# Altium PCB pcb5.PcbDoc
Units mil, origin at the board's own origin, x right, y up, seen from the top; angles counter-clockwise.
Board outline 2900 x 3720 mil, 4 copper layers (SIG/PWR1, GND1, SIG/PWR2, GND2), stack 23.756 mil thick; 78 components, 67 nets, 242 pads, 145 vias.
Unrouted connection lines stored in the file: 14.
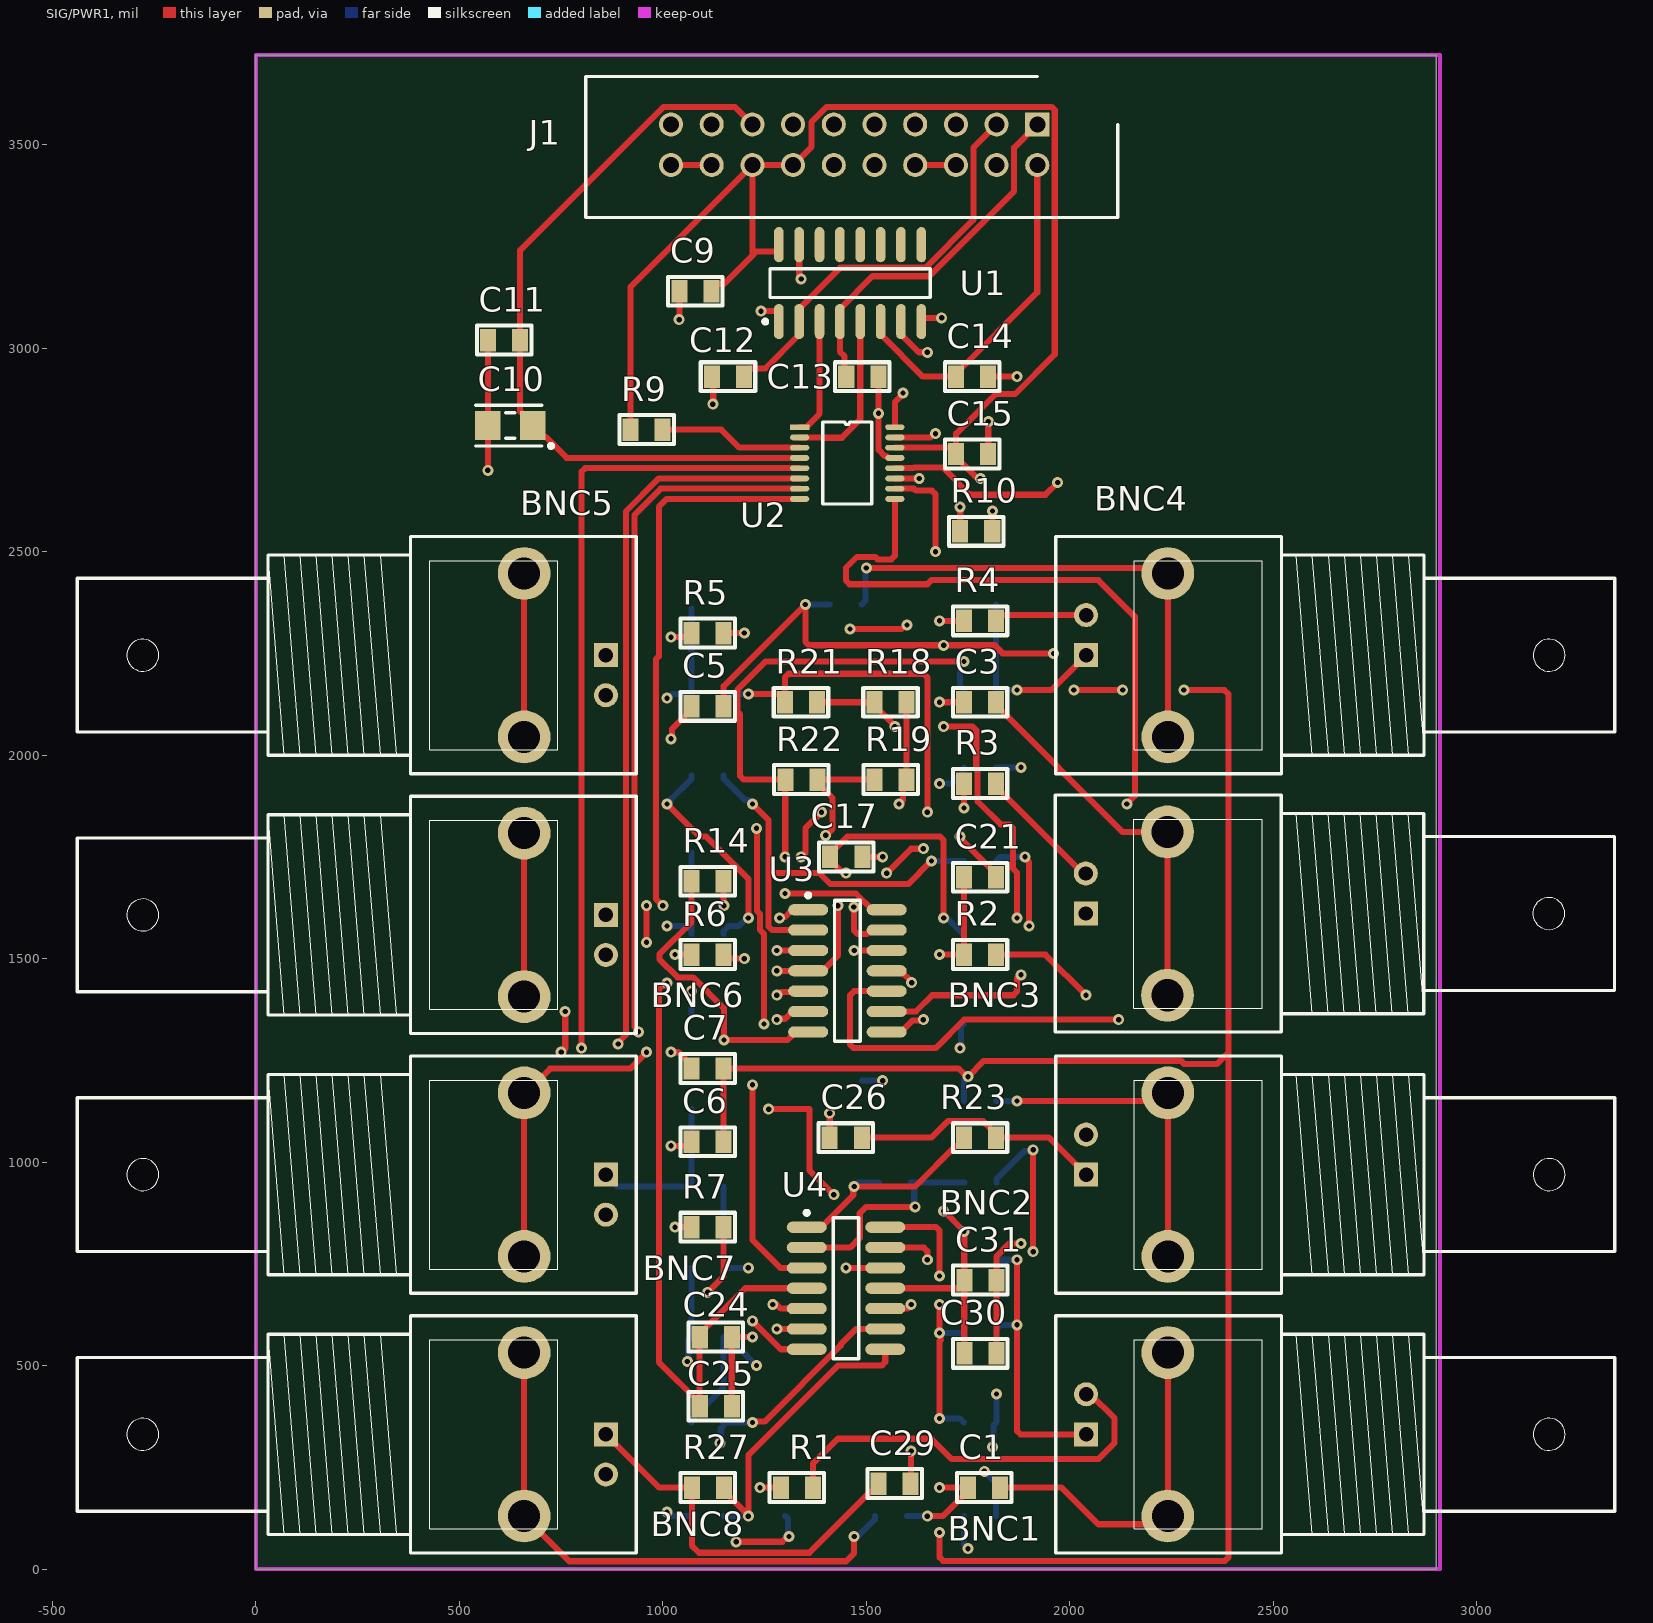
[diagram p0: SIG/PWR1 view]
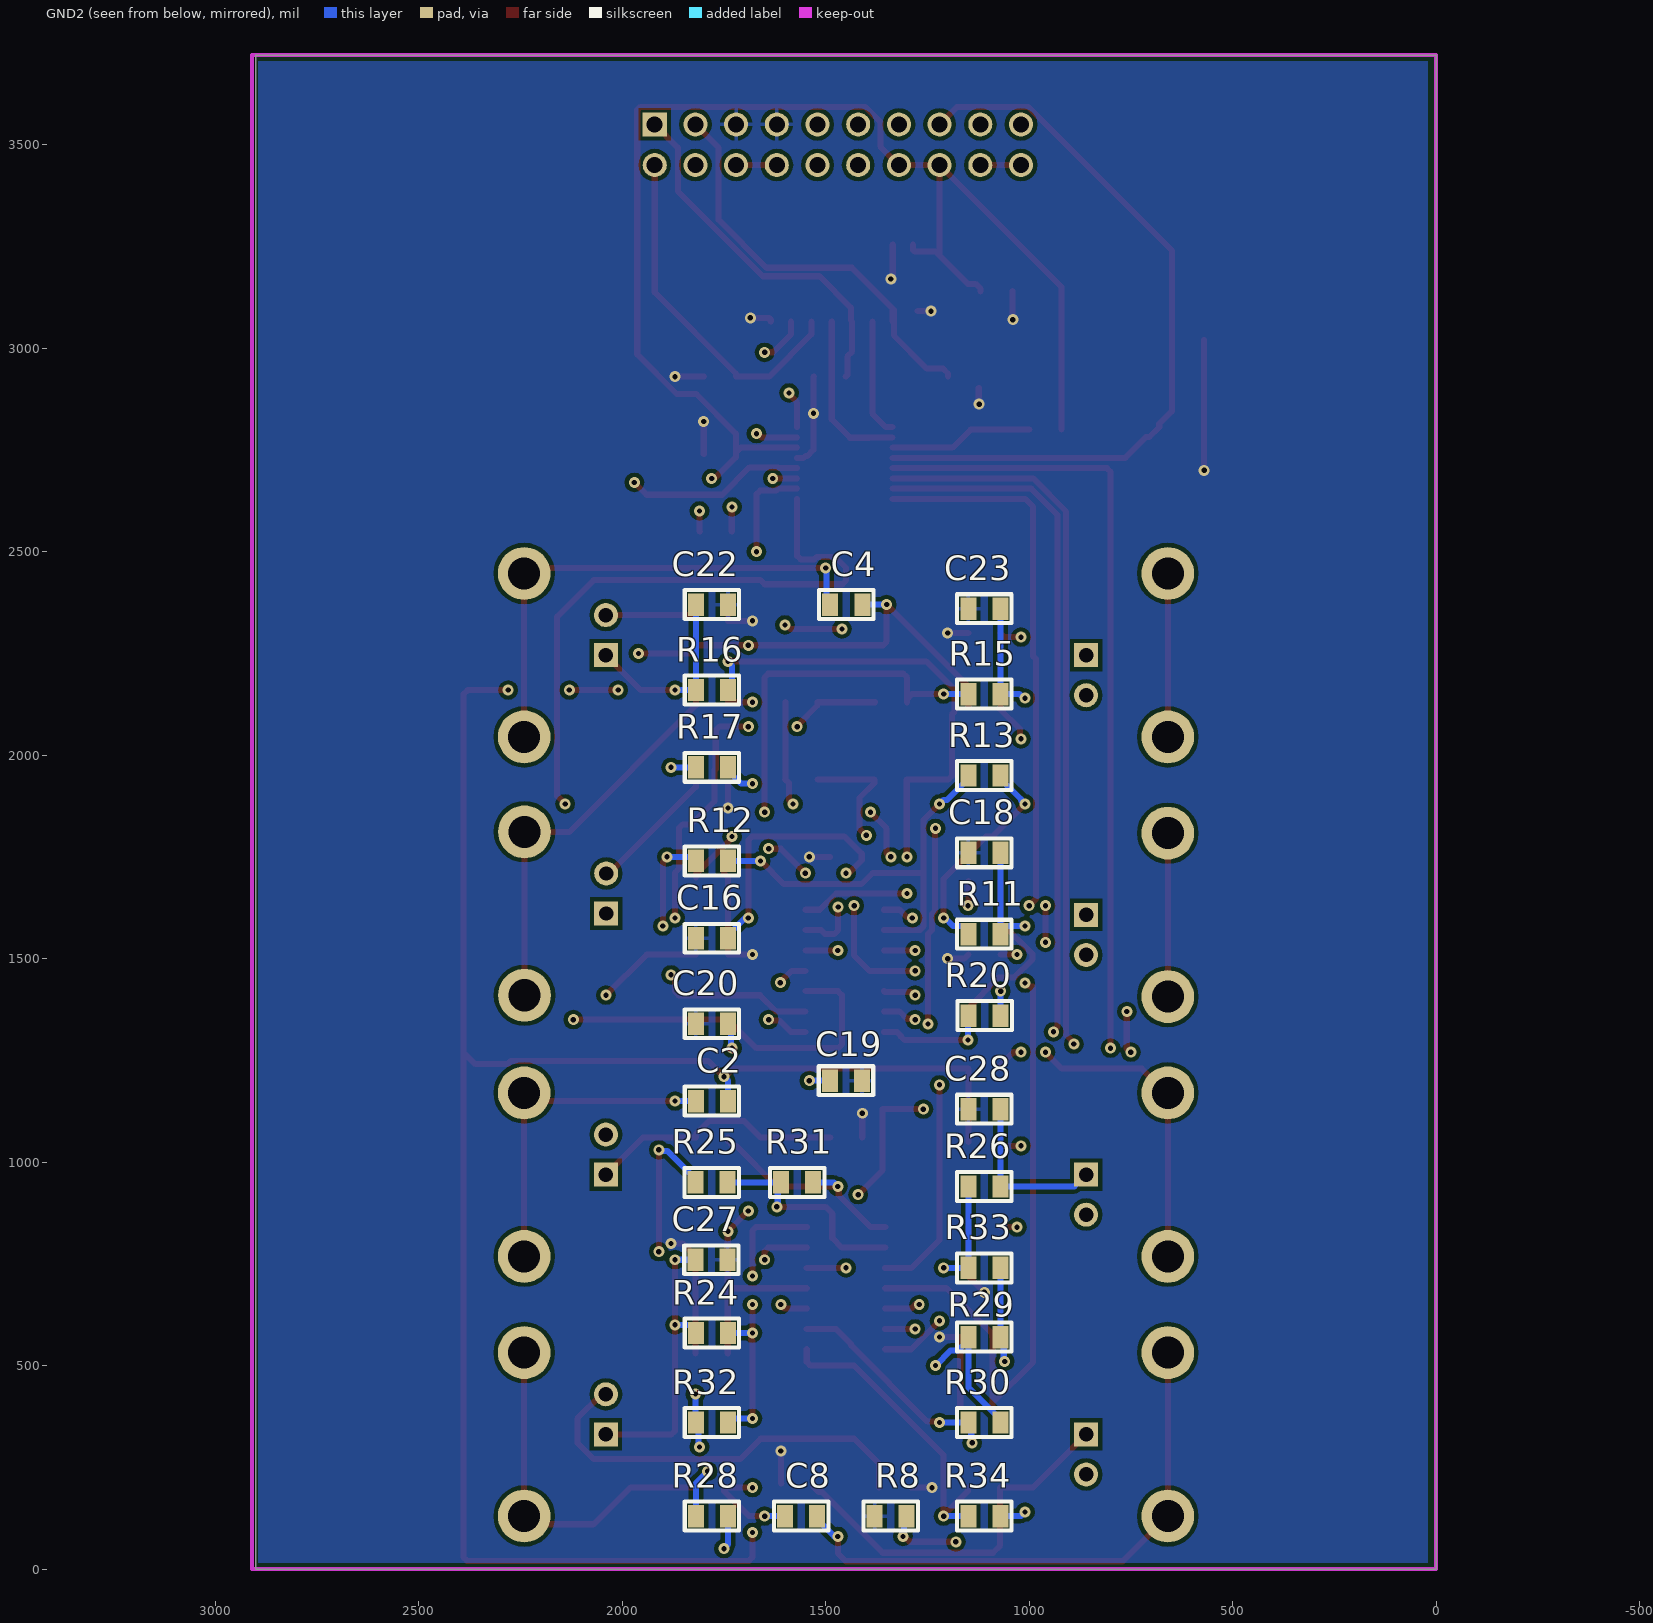
[diagram p1: GND2 view, seen from below]
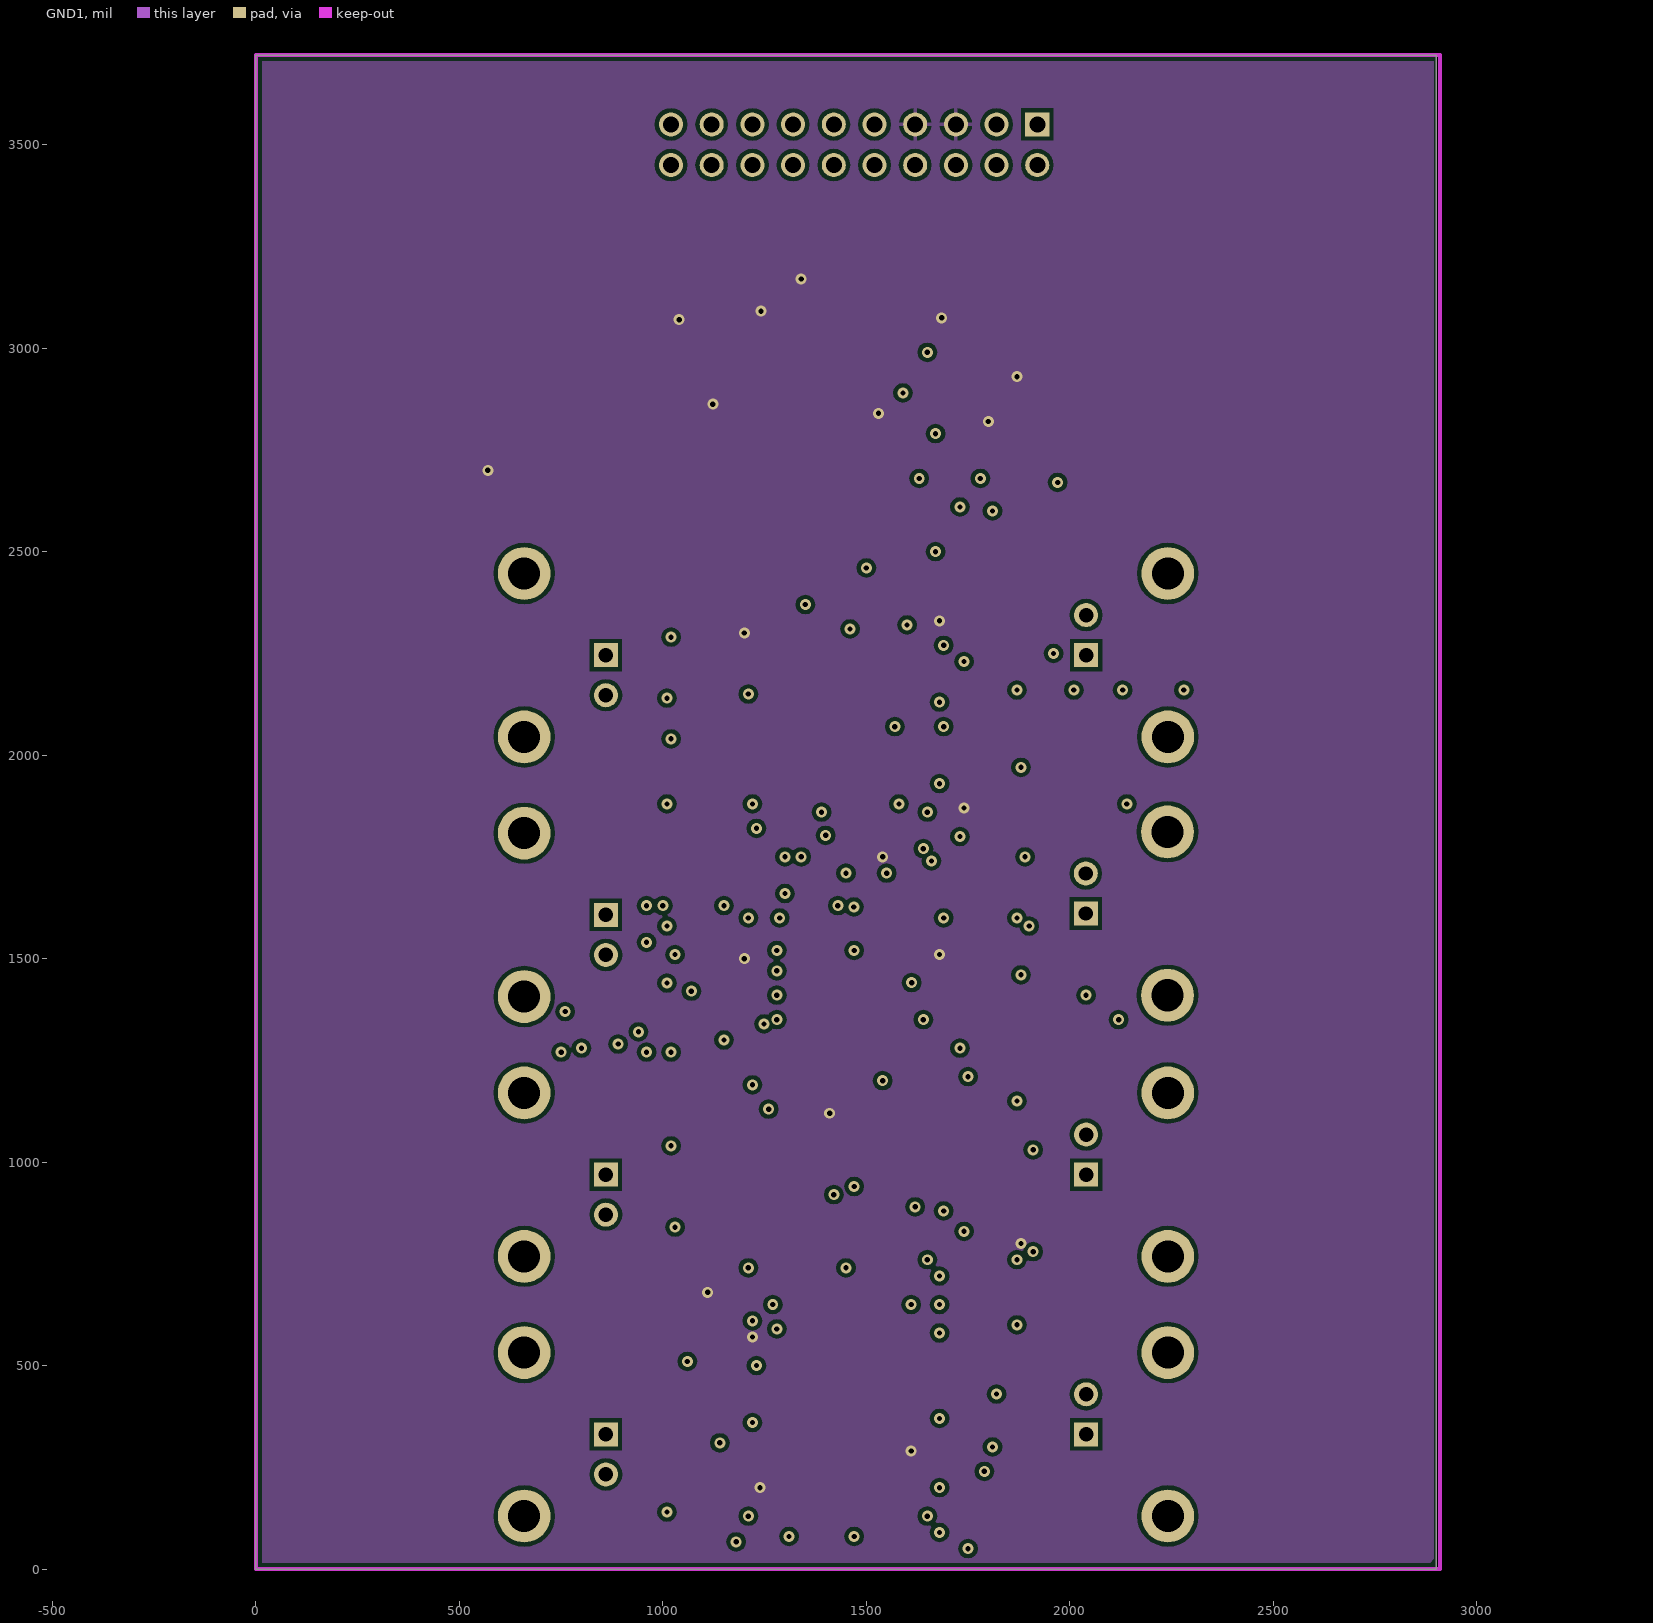
[diagram p2: GND1]
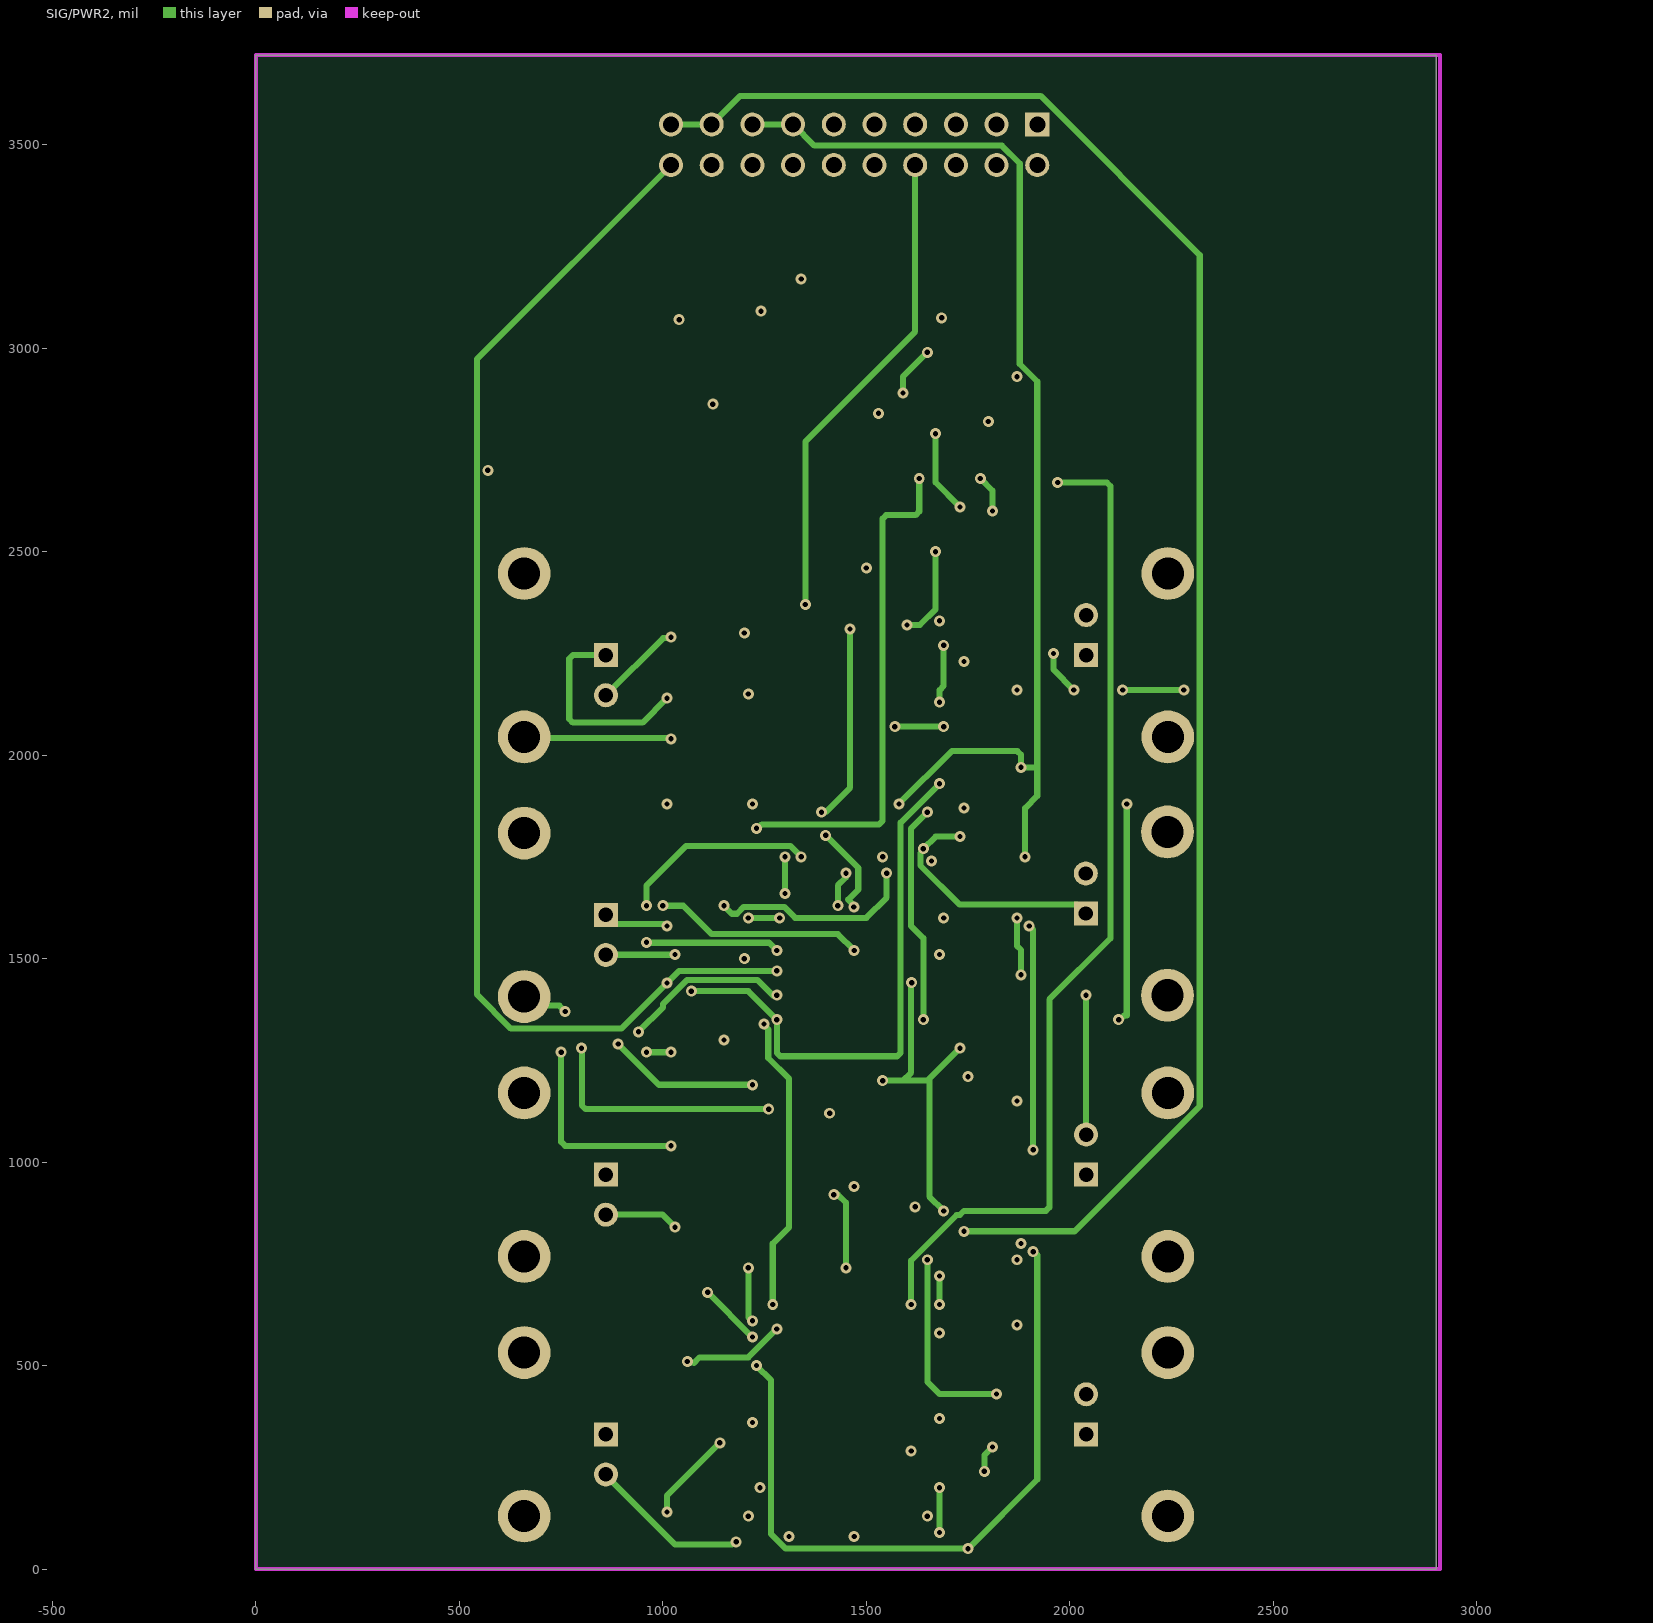
[diagram p3: SIG/PWR2]

## Layer stack, top to bottom
Top Solder: solder mask 0.4, Solder Resist, Dk 3.5
SIG/PWR1: signal copper 1.4
Dielectric 2: prepreg 2.8, PP-006, Dk 4.1
GND1: signal copper 1.378
Dielectric 1: dielectric 12.6, FR-4, Dk 4.8
SIG/PWR2: signal copper 1.378
Dielectric 3: prepreg 2.8, PP-006, Dk 4.1
GND2: signal copper 1.4
Bottom Solder: solder mask 0.4, Solder Resist, Dk 3.5

## Board outline
0,0 0,2800 0,3720 2900,3720 2900,2800 2900,0

## Design rules (kind name [scope] priority, off if disabled: settings)
Clearance [All] p1: gap=6 ignorepadtopadclearanceinfootprint=FALSE except(10: Arc-Poly Track-Poly SMDPad-Poly THPad-Poly Via-Poly Fill-Poly Poly-Poly)
MinimumSolderMaskSliver [All] p1: minsoldermaskwidth=0
PolygonConnect [All] p1: thpad.connectstyle=Relief thpad.reliefconductorwidth=10 thpad.reliefentries=4 thpad.polygonreliefangle="90 Angle" thpad.airgapwidth=10 smdpad.connectstyle=Relief smdpad.reliefconductorwidth=10 smdpad.reliefentries=4 smdpad.polygonreliefangle="90 Angle" smdpad.airgapwidth=10 via.connectstyle=Direct via.reliefconductorwidth=10 via.reliefentries=4 via.polygonreliefangle="90 Angle" via.airgapwidth=10
RoutingVias [All] p1: holewidth=12 width=24 viastyle="Through Hole" minholewidth=1 minwidth=12 maxholewidth=13 maxwidth=27
SilkToSilkClearance [All] p1: silktosilkclearance=1
SilkToSolderMaskClearance [IsPad] p1: minsilkscreentomaskgap=0 clearancetoexposedcopper=TRUE
SolderMaskExpansion [All] p1: expansion=3 istentingtop=FALSE
Width Width_2 [(InNet('+5V_ADC') OR InNet('-5V_ADC') OR InNet('D+5V'))] p1: maxlimit=18 minlimit=10 preferedwidth=15
Width [All] p2: maxlimit=20 minlimit=10 preferedwidth=15
27 further rules are at their usual default settings.

## Components (designator, comment, footprint, x,y, rotation, side; value= is the part's Value field where it differs from the comment)
BNC1 "BNC" BNC 2040,330.99 r180 top
BNC2 "BNC" BNC 2040,969.2 r180 top
BNC3 "BNC" BNC 2039.21,1610.79 r180 top
BNC4 "BNC" BNC 2040,2245.63 r180 top
BNC5 "BNC" BNC 860,2245.63 r0 top
BNC6 "BNC" BNC 860,1607.42 r0 top
BNC7 "BNC" BNC 860,969.2 r0 top
BNC8 "BNC" BNC 860,330.99 r0 top
C1 "102" 0805 1789.37,200 r180 top
C2 "102" 0805 1779.37,1150 r180 bottom
C3 "102" 0805 1779.37,2130 r180 top
C4 "102" 0805 1449.37,2370 r180 bottom
C5 "102" 0805 1110,2120 r0 top
C6 "102" 0805 1110,1050 r0 top
C7 "102" 0805 1110,1230 r0 top
C8 "102" 0805 1560.42,130 r0 bottom
C9 "104" 0805 1080,3140 r180 top value=0.1uF
C10 "10uf 6.3V" "1206 (钽电容)" 680.24,2810 r180 top
C11 "104" 0805 610,3020 r0 top value=101
C12 "101" 0805 1160,2930 r180 top
C13 "101" 0805 1490,2930 r0 top
C14 "101" 0805 1760,2930 r0 top
C15 "104" 0805 1760,2740 r180 top value=101
C16 "105" 0805 1779.37,1550 r180 bottom value=101
C17 "103" 0805 1450.63,1750 r0 top value=101
C18 "102" 0805 1110,1760 r0 bottom
C19 "105" 0805 1450,1200 r0 bottom value=101
C20 "103" 0805 1779.37,1340 r0 bottom value=101
C21 "102" 0805 1779.37,1700 r180 top
C22 "102" 0805 1779.37,2370 r180 bottom
C23 "102" 0805 1110,2360 r0 bottom
C24 "105" 0805 1130,570 r180 top value=101
C25 "103" 0805 1130,400 r0 top value=101
C26 "102" 0805 1449.37,1060 r180 top
C27 "102" 0805 1780.63,760 r180 bottom
C28 "102" 0805 1110,1130 r0 bottom
C29 "102" 0805 1569.37,210 r0 top
C30 "105" 0805 1780,530 r180 top value=101
C31 "103" 0805 1780,710 r0 top value=101
J1 "HIF3FC-20PA-2.54DSA" SHDR20W56P254_2X10_3290X850X950P 1920,3550 r180 top
R1 "0R" 0805 1329.37,200 r0 top value=10K
R2 "0R" 0805 1779.37,1510 r0 top value=10K
R3 "0R" 0805 1779.37,1930 r0 top value=10K
R4 "0R" 0805 1779.37,2330 r0 top value=10K
R5 "0R" 0805 1110,2300 r180 top value=10K
R6 "0R" 0805 1110,1510 r180 top value=10K
R7 "0R" 0805 1110,840 r180 top value=10K
R8 "0R" 0805 1340.21,130 r180 bottom value=10K
R9 "1k" 0805 960,2800 r0 top value=10K
R10 "1k" 0805 1770,2550 r180 top value=10K
R11 "510" 0805 1110,1560 r180 bottom value=3.3K
R12 "10k" 0805 1779.37,1740 r180 bottom value=10K
R13 "10k" 0805 1110,1950 r180 bottom value=10K
R14 "510" 0805 1110,1690 r0 top value=3.3K
R15 "510" 0805 1110,2150 r180 bottom value=3.3K
R16 "510" 0805 1779.37,2160 r0 bottom value=3.3K
R17 "10k" 0805 1779.37,1970 r180 bottom value=10K
R18 "10k" 0805 1559.37,2130 r180 top value=10K
R19 "10k" 0805 1559.79,1940 r180 top value=10K
R20 "10k" 0805 1109.37,1360 r0 bottom value=10K
R21 "10k" 0805 1339.37,2130 r180 top value=10K
R22 "10k" 0805 1340.21,1940 r180 top value=10K
R23 "510" 0805 1779.37,1060 r0 top value=3.3K
R24 "510" 0805 1779.37,580 r0 bottom value=3.3K
R25 "10k" 0805 1780,950 r180 bottom value=10K
R26 "510" 0805 1110,940 r180 bottom value=3.3K
R27 "510" 0805 1110.63,200 r180 top value=3.3K
R28 "10k" 0805 1779.37,130 r0 bottom value=10K
R29 "10k" 0805 1110,570 r180 bottom value=10K
R30 "10k" 0805 1110,360 r0 bottom value=10K
R31 "10k" 0805 1570,950 r180 bottom value=10K
R32 "10k" 0805 1779.37,360 r180 bottom value=10K
R33 "10k" 0805 1110,740 r0 bottom value=10K
R34 "10k" 0805 1110,130 r0 bottom value=10K
U1 "SN74HC365D" D016_N 1460,3160 r90 top
U2 "DAC_MAX5307" TSSOP16 1336.14,2805.98 r0 top
U3 "LM224DR" SOIC14_M 1453.54,1470 r0 top
U4 "LM224DR" SOIC14_M 1450,690 r0 top

## Footprints (in the part's own frame and the unit in brackets; to place one, negate y for a bottom-side part, rotate by r counter-clockwise, add the part's x,y. Pads: shape width x height; smd on the part's side, far side on the other; paste and mask are expansions set on the pad)
0805 [mm]
  rect 1x1.4 smd: 1(-1,0) 2(1,0)
  silkscreen extent -1.7,-0.9 1.7,0.9
"1206 (钽电容)" [mm]
  rect 1.6x1.8 smd: 1(0,0) 2(2.8,0)
  silkscreen extent -1.27,-1.27 3.56,1.39
BNC [mm]
  rect 1.5x1.5 hole 0.9: 1(0,0)
  round 1.5 hole 0.9: 2(0,-2.5)
  round 3.3 hole 2: 3(-5.1,5.1) 4(-5.1,-5.1)
  silkscreen extent -33,-7.4 1.9,7.4
D016_N [mm]
  oval 2.2x0.6 smd: 1(-2.4,4.445) 2(-2.4,3.175) 3(-2.4,1.905) 4(-2.4,0.635) 5(-2.4,-0.635) 6(-2.4,-1.905) 7(-2.4,-3.175) 8(-2.4,-4.445) 9(2.4,-4.445) 10(2.4,-3.175) 11(2.4,-1.905) 12(2.4,-0.635) 13(2.4,0.635) 14(2.4,1.905) 15(2.4,3.175) 16(2.4,4.445)
  silkscreen extent -2.52,-5 0.9,5.42
SHDR20W56P254_2X10_3290X850X950P [mm]
  rect 1.5x1.5 hole 1: 1(0,0)
  round 1.5 hole 1: 2(0,2.54) 3(2.54,0) 4(2.54,2.54) 5(5.08,0) 6(5.08,2.54) 7(7.62,0) 8(7.62,2.54) 9(10.16,0) 10(10.16,2.54) 11(12.7,0) 12(12.7,2.54) 13(15.24,0) 14(15.24,2.54) 15(17.78,0) 16(17.78,2.54) 17(20.32,0) 18(20.32,2.54) 19(22.86,0) 20(22.86,2.54)
  silkscreen extent -5.02,-2.98 28.18,5.82, body extent -5.02,-2.98 27.88,5.52, height 9.5
SOIC14_M [mm]
  oval 2.5x0.7 smd: 1(-2.45,3.81) 2(-2.45,2.54) 3(-2.45,1.27) 4(-2.45,0) 5(-2.45,-1.27) 6(-2.45,-2.54) 7(-2.45,-3.81) 8(2.45,-3.81) 9(2.45,-2.54) 10(2.45,-1.27) 11(2.45,0) 12(2.45,1.27) 13(2.45,2.54) 14(2.45,3.81)
  silkscreen extent -2.57,-4.4 0.8,4.83, body extent -2,-4.38 2,4.38, height 1.75
TSSOP16 [mm]
  rect 1.2x0.36 smd: 1(0,0)
  oval 1.2x0.36 smd: 2(0,-0.64) 3(0,-1.28) 4(0,-1.92) 5(0,-2.56) 6(0,-3.2) 7(0,-3.84) 8(0,-4.48) 9(5.94,-4.48) 10(5.94,-3.84) 11(5.94,-3.2) 12(5.94,-2.56) 13(5.94,-1.92) 14(5.94,-1.28) 15(5.94,-0.64) 16(5.94,0)
  silkscreen extent 1.43,-4.8 4.5,0.32

## Part data
BNC1 BNC2 BNC3 BNC4 BNC5 BNC6 BNC7 BNC8: "BNC Elbow Connector", LatestRevisionDate=17-Jul-2002, LatestRevisionNote="Re-released for DXP Platform.", Publisher="Altium Limited"
C1 C2 C3 C4 C5 C6 C7 C8 C12 C13 C14: library part "Cap Semi", "Capacitor (Semiconductor SIM Model)", LatestRevisionDate=17-Jul-2002, LatestRevisionNote="Re-released for DXP Platform.", PackageReference=C1206, Published=8-Jun-2000, Publisher="Altium Limited"
C9 C11 C15 C16 C17 C18 C19 C20 C21 C22 C23 C24 C25 C26 C27 C28 C29 C30 C31: library part Cap, "Capacitor", LatestRevisionDate=17-Jul-2002, LatestRevisionNote="Re-released for DXP Platform.", PackageReference=RAD-0.3, Published=8-Jun-2000, Publisher="Altium Limited"
C10: library part "Cap Pol1", "Polarized Capacitor (Radial)", LatestRevisionDate=17-Jul-2002, LatestRevisionNote="Re-released for DXP Platform.", Published=8-Jun-2000, Publisher="Altium Limited"
J1: "Connector", Arrow Part Number=HIF3FC-20PA-2.54DSA(71), Manufacturer_Name=Hirose, Mouser Part Number=798-HIF3FC20PA254D71, Arrow Price/Stock=https://www.arrow.com/en/products/hif3fc-20pa-2.54dsa-71/hirose-electric?region=nac, Datasheet Link=https://www.hirose.com/product/en/products/HIF3FC/HIF3FC-20PA-2.54DSA%2871%29/, Height=9.5mm, Manufacturer_Part_Number=HIF3FC-20PA-2.54DSA(71), Mouser Price/Stock=https://www.mouser.co.uk/ProductDetail/Hirose-Connector/HIF3FC-20PA-254DSA71?qs=eDUdFcBPps3XO21sCrEU%252BQ%3D%3D, System=Connector
R1 R2 R3 R4 R5 R6 R7 R8 R9 R10 R11 R12 R13 R14 R15 R16 R17 R18 R19 R20 R21 R22 R23 R24 R25 R26 R27 R28 R29 R30 R31 R32 R33 R34: library part Res2, "Resistor", LatestRevisionDate=17-Jul-2002, LatestRevisionNote="Re-released for DXP Platform.", PackageReference=AXIAL-0.4, Published=8-Jun-2000, Publisher="Altium Limited"
  R11 R14 R15 R16 R23 R24 R26 R27: PackageDescription="Axial Device, Thru-Hole; 2 Leads; 0.4 in Pin Spacing"
U2: library part MAX5307, "12-Bit DACs with Serial Interfece", Code_IPC=SOIC127P1030-16, Code_JEDEC=MS-013-AA, ComponentLink1Description="Manufacturer Link", ComponentLink1URL=http://www.maxim-ic.com/, ComponentLink2Description=Datasheet, ComponentLink2URL=http://pdfserv.maxim-ic.com/en/ds/MAX520-MAX521.pdf, DatasheetVersion=Sep-1996, LatestRevisionDate=13-Apr-2006, LatestRevisionNote="IPC-7351 Footprint Added.", PackageDescription="16-Pin Small Outline Integrated Circuit 1.27 mm Pitch", PackageReference=WSO16, Published=16-Jan-2001, Publisher="Altium Limited"
U3 U4: library part LM124

## Via types
v1: diameter 27, hole 13, SIG/PWR1 to GND2, 145 vias

## Nets (pads, with @x,y where several pads share a name; then routed paths per layer and width w, separated by ;. In a path a pad name is that pad's centre, name@x,y a point inside that pad or via, vN(x,y) a via of type N, cw(c..) or ccw(c..) an arc to the next point about the centre after c; other vN are vias at no path point)
-5V_ADC: C19.2 C20.1 C30.2 C31.1 J1.17 J1.19 U3.11 U4.11 | length 5859.9
  SIG/PWR1 w15: U4.11 1728.45,690 C31.1@1740.63,702.18 ; U3.11 1583.84,1470 1611.24,1442.6 v1(1611.24,1441.01) ; v1(1690,880) v1(1740,830) 1740.63,829.37 C31.1 C31.1@1740.63,702.19 ; C30.2 C31.1@1740.63,702.18
  SIG/PWR2 w15: J1.19 J1.17 1190,3620 1928.15,3620 2319.25,3228.9 2319.25,1137.49 2011.76,830 v1(1740,830) ; v1(1540,1200) 1590,1200 ; v1(1611.24,1441.01) 1610,1439.77 1610,1220 1590,1200 ; v1(1690,880) 1655,915 1655,1205 ; v1(1730,1280) 1655,1205 ; 1590,1200 1650,1200 1655,1205
  GND2 w15: C19.2 v1(1540,1200) ; v1(1730,1280) 1732.3,1282.3 1732.3,1332.3 C20.1
A+5V: C16.2 C17.1 C24.2 C25.1 J1.18 J1.20 U3.4 U4.4 | length 5752.1
  SIG/PWR1 w15: v1(1010,1440) 1006.75,1440 997.97,1431.21 990,1431.21 990,508.5 C25.1@1090,408.5 ; J1.20 J1.18 ; C25.1 1090.63,407.87 C25.1@1090,408.5 ; v1(1280,1470) U3.4 1392.52,1470 1430,1507.48 v1(1430,1630) ; U4.4 1202.76,690 1090.63,577.87 C24.2 1090,569.37 C25.1@1090,408.5 ; v1(1450,1710) 1447.7,1712.3 1441.09,1712.3 1411.26,1742.13 C17.1 1411.26,1757.87 1453.39,1800 1681.21,1800 1690,1791.21 v1(1690,1600)
  SIG/PWR2 w15: J1.20 543,2973 543,1411.88 626.71,1328.17 898.17,1328.17 1040,1470 v1(1280,1470) ; v1(1430,1630) 1430,1680 1450,1700 v1(1450,1710)
  GND2 w15: v1(1690,1600) 1697.87,1600 1740,1557.87 C16.2
AGND: C9.2 C10.2 C11.1 C12.2 C13.2 C14.2 C15.1 C16.1 C17.2 C18.2 C19.1 C20.2 C21.2 C22.2 C23.2 C24.1 C25.2 C26.2 C27.2 C28.2 C29.2 C30.1 C31.2 J1.5 J1.7 R1.1 R2.1 R3.1 R4.1 R5.1 R6.1 R7.1 R8.1 U1.1 U1.8 U1.15 U2.13 | length 2590
  SIG/PWR1 w15: v1(570,2700) C10.2 570.63,2810.63 C11.1 ; v1(1040,3070) 1040.63,3070.63 C9.2 ; v1(1110,680) 1149.37,719.37 R7.1 ; v1(1122.89,2862.51) 1123.91,2863.54 C12.2@1123.91,2902.51 ; R6.1 1159.37,1500 v1(1200,1500) ; R5.1 v1(1200,2300) ; C25.2 C24.1 v1(1220,570) ; v1(1238.91,200) R1.1 ; v1(1241.05,3091.05) U1.1@1274.18,3091.05 ; U1.15 1335,3178.25 1340,3173.25 v1(1340,3170) ; C26.2 v1(1410,1120) ; C17.2 v1(1540,1750) ; C13.2 1530,2929.37 v1(1530,2840) 1530,2749.94 1544.94,2735 1549.68,2735 1554.29,2730.39 U2.13 ; C29.2 1609.37,210.63 1609.37,289.37 v1(1610,290) ; U1.8 1635,3070.51 1638.98,3074.49 v1(1685,3074.49) ; v1(1680,1510) R2.1 C21.2 C21.2@1750,1710 ; v1(1680,2330) R4.1 R4.1@1740,2337.87 ; v1(1740,1870) R3.1 ; C15.1 1799.63,2740.26 1799.63,2819.86 v1(1799.88,2820.12) ; C14.2 v1(1870,2930) ; C30.1 C31.2 1819.37,767.85 1851.52,800 v1(1880,800)
  SIG/PWR2 w15: v1(1110,680) v1(1220,570)
D+5V: C9.1 C15.2 J1.14 J1.16 R9.1 R10.1 U1.16 U2.14 | length 3425.5
  SIG/PWR1 w15: R9.1 920.63,3150.63 J1.16 ; C9.1 1119.37,3145.9 1131.56,3158.08 1150.35,3158.08 1220,3227.73 ; U1.16 1285,3241.71 1281.02,3237.73 1230,3237.73 1220,3227.73 ; U2.14 1708.44,2755.59 1720.63,2743.4 1720.63,2732.13 1772.76,2680 v1(1780,2680) ; C15.2 1720.63,2790.06 1818.02,2887.45 1865.64,2887.45 1963.03,2984.84 1963.03,3585.12 1955.12,3593.03 1402.18,3593.03 1365.3,3556.15 1365.3,3495.3 J1.14 J1.16 ; R10.1 1809.68,2550.32 1809.68,2599.68 v1(1810,2600) ; 1220,3227.73 J1.16
  SIG/PWR2 w15: v1(1780,2680) 1810,2650 v1(1810,2600)
DACA: BNC1.1 C27.1 R24.2 | length 708
  SIG/PWR1 w15: v1(1870,760) v1(1870,600) 1870,339.78 1878.79,330.99 BNC1.1
  GND2 w15: R24.2 1818.74,587.81 1830.93,600 v1(1870,600) ; C27.1 v1(1870,760)
DACB: BNC2.1 C26.1 R23.2 | length 627.5
  SIG/PWR1 w15: C26.1 1660,1060 1701.06,1101.06 1785.55,1101.06 1818.74,1067.87 R23.2 1949.2,1060 BNC2.1
DACC: BNC3.1 C21.1 R14.2 | length 1420.4
  SIG/PWR1 w15: R14.2 1149.37,1630.63 v1(1150,1630) ; v1(1550,1710) 1560,1720 1610,1770 v1(1640,1770) ; v1(1730,1800) 1730,1796.61 1818.74,1707.87 C21.1
  SIG/PWR2 w15: v1(1150,1630) 1169.69,1610.31 1182.12,1610.31 1198.82,1627 1298.18,1627 1325.18,1600 1500,1600 1550,1650 v1(1550,1710) ; v1(1730,1800) 1670,1800 v1(1640,1770) 1640,1766.75 1633,1759.75 1633,1728.82 1729,1632.82 2017.18,1632.82 BNC3.1
DACD: BNC4.1 C22.1 R16.2 | length 466.7
  SIG/PWR1 w15: v1(1870,2160) 1954.37,2160 BNC4.1
  GND2 w15: C22.1 R16.2 v1(1870,2160)
DACE: BNC5.1 C23.1 R15.2 | length 785
  SIG/PWR2 w15: BNC5.1 778.79,2245.63 770,2236.84 770,2088.79 778.79,2080 950,2080 v1(1010,2140)
  GND2 w15: v1(1010,2140) 1013.25,2140 1023.25,2150 R15.2 C23.1
DACF: BNC6.1 C18.1 R11.2 | length 427
  SIG/PWR2 w15: BNC6.1 882.03,1585.39 1001.36,1585.39 1006.75,1580 v1(1010,1580)
  GND2 w15: v1(1010,1580) 1058.44,1580 R11.2@1070.63,1567.81 ; R11.2 R11.2@1070.63,1567.81 ; C18.1 R11.2@1070.63,1567.81
DACG: BNC7.1 C28.1 R26.2 | length 412.7
  GND2 w15: BNC7.1 889.2,940 R26.2 C28.1
DACH: BNC8.1 C29.1 R27.2 | length 949
  SIG/PWR1 w15: BNC8.1 990.99,200 R27.2 1071.26,57.53 1088.79,40 1360,40 1509.94,189.94 1517.81,189.94 1530,202.13 C29.1
NetBNC1_2: BNC1.2 R1.2 | length 1017.3
  SIG/PWR1 w15: R1.2 1368.74,258.74 1430,320 1660,320 1710,270 2070,270 2110,310 2110,370 2050.59,429.41 BNC1.2
NetBNC1_3: BNC1.3 BNC1.4 C1.1 | length 859.3
  SIG/PWR1 w15: C1.1 1980,200 2070,110 2220.59,110 BNC1.3 BNC1.4
NetBNC2_2: BNC2.2 R2.2 | length 605.1
  SIG/PWR1 w15: R2.2 1940,1510 v1(2040,1410)
  SIG/PWR2 w15: BNC2.2 v1(2040,1410)
NetBNC2_3: BNC2.3 BNC2.4 C2.1 | length 831.9
  SIG/PWR1 w15: v1(1870,1150) 2220.8,1150 BNC2.4 BNC2.3
  GND2 w15: C2.1 v1(1870,1150)
NetBNC3_2: BNC3.2 R3.2 | length 316.5
  SIG/PWR1 w15: R3.2 1818.74,1922.13 2031.65,1709.21 BNC3.2
NetBNC3_3: BNC3.3 BNC3.4 C3.1 | length 959.3
  SIG/PWR1 w15: C3.1 1818.74,2122.13 2129.29,1811.58 BNC3.4 BNC3.3
NetBNC4_2: BNC4.2 R4.2 | length 228.2
  SIG/PWR1 w15: R4.2 1818.74,2331.87 1830.93,2344.05 BNC4.2
NetBNC4_3: BNC4.3 BNC4.4 C4.1 | length 1242.7
  SIG/PWR1 w15: v1(1500,2460) 2227.21,2460 BNC4.4 BNC4.3
  GND2 w15: C4.1 1497.7,2378.96 1497.7,2457.7 v1(1500,2460)
NetBNC5_2: BNC5.2 R5.2 | length 273.9
  SIG/PWR1 w15: v1(1020,2290) 1060.63,2290 R5.2
  SIG/PWR2 w15: BNC5.2 1000.5,2287.7 1017.7,2287.7 v1(1020,2290)
NetBNC5_3: BNC5.3 BNC5.4 C5.1 | length 865.3
  SIG/PWR1 w15: BNC5.4 BNC5.3 ; v1(1020,2040) 1022.3,2042.3 1022.3,2063.79 1070.63,2112.13 C5.1
  SIG/PWR2 w15: BNC5.4 661.76,2042.3 1017.7,2042.3 v1(1020,2040)
NetBNC6_2: BNC6.2 R6.2 | length 211
  SIG/PWR1 w15: v1(1030,1510) R6.2
  SIG/PWR2 w15: BNC6.2 860.51,1509.49 1029.49,1509.49 v1(1030,1510)
NetBNC6_3: BNC6.3 BNC6.4 C6.1 | length 1171.3
  SIG/PWR1 w15: BNC6.4 BNC6.3 ; v1(750,1270) 751.21,1270 760,1278.79 v1(760,1370) ; v1(1020,1040) 1060.63,1040 C6.1
  SIG/PWR2 w15: BNC6.4 681.2,1384.64 745.36,1384.64 v1(760,1370) ; v1(750,1270) 750,1050 760,1040 v1(1020,1040)
NetBNC7_2: BNC7.2 R7.2 | length 223.4
  SIG/PWR1 w15: v1(1030,840) R7.2
  SIG/PWR2 w15: BNC7.2 999.22,870.78 v1(1030,840)
NetBNC7_3: BNC7.3 BNC7.4 C7.1 | length 875.6
  SIG/PWR1 w15: BNC7.4 BNC7.3 663.2,1169.99 723.05,1229.84 919.84,1229.84 v1(960,1270) ; v1(1020,1270) 1038.5,1270 1070.63,1237.87 C7.1
  SIG/PWR2 w15: v1(960,1270) v1(1020,1270)
NetBNC8_2: BNC8.2 R8.2 | length 585.1
  SIG/PWR1 w15: v1(1180,67) 1293.75,67 1306.75,80 v1(1310,80)
  SIG/PWR2 w15: BNC8.2 860,230 1030,60 1170,60 1177,67 v1(1180,67)
  GND2 w15: R8.2 1307.7,123.14 1307.7,82.3 v1(1310,80)
NetBNC8_3: BNC8.3 BNC8.4 C8.1 | length 1384.2
  SIG/PWR1 w15: BNC8.3 BNC8.4 770.41,19 1450.21,19 1470,38.79 v1(1470,80)
  GND2 w15: v1(1470,80) 1478.92,80 1521.05,122.13 C8.1
NetR9_2: R9.2 U2.3 | length 355.2
  SIG/PWR1 w15: R9.2 1143.79,2800 1188.2,2755.59 U2.3
NetR10_2: R10.2 U2.15 | length 368.9
  SIG/PWR1 w15: U2.15 1657.54,2780.79 1666.75,2790 v1(1670,2790) ; v1(1730,2610) 1730.63,2609.37 R10.2
  SIG/PWR2 w15: v1(1670,2790) 1670,2670 v1(1730,2610)
NetR11_1: R11.1 R13.2 U3.1 | length 705
  SIG/PWR1 w15: v1(1010,1880) 1089.57,1800.43 1105.28,1800.43 1210,1695.71 v1(1210,1600) ; v1(1287,1600) 1289.3,1602.3 1300.55,1602.3 1318.25,1620 U3.1
  SIG/PWR2 w15: v1(1210,1600) v1(1287,1600)
  GND2 w15: v1(1010,1880) 1011.21,1880 1020,1888.79 1020,1891.5 1070.63,1942.13 R13.2 ; R11.1 1149.37,1567.87 1161.56,1580.06 1186.81,1580.06 1206.75,1600 v1(1210,1600)
NetR12_2: R12.2 R13.1 U3.2 | length 1037.5
  SIG/PWR1 w15: v1(1220,1880) 1260,1840 1260,1710 ; U3.2 1268.79,1570 1260,1578.79 1260,1710 ; v1(1660,1740) 1603,1683 1411.92,1683 1384.92,1710 1260,1710
  GND2 w15: R13.1 1149.37,1942.13 1201.5,1890 1210,1890 v1(1220,1880) ; v1(1660,1740) R12.2
NetR14_1: R14.1 R20.2 U3.7 | length 787.6
  SIG/PWR1 w15: R14.1 1070.63,1589.99 991.53,1510.89 991.53,1498.47 1035.98,1454.02 1074.17,1454.02 1150,1378.18 v1(1150,1300) 1306.59,1300 1315.37,1308.79 1315.37,1310.32 1325.05,1320 U3.7
  GND2 w15: R20.2 1150,1358.74 v1(1150,1300)
NetR15_1: R15.1 R21.2 U3.8 | length 1546.8
  SIG/PWR1 w15: v1(1210,2150) 1287.81,2150 R21.2@1300,2137.81 ; R21.2 R21.2@1300,2137.81 ; U3.8 1585.43,1320 1613.14,1347.7 1637.7,1347.7 v1(1640,1350) ; v1(1650,1860) 1650,2191.21 1641.21,2200 1308.79,2200 1300,2191.21 R21.2@1300,2137.81
  SIG/PWR2 w15: v1(1640,1350) 1640,1550 1610,1580 1610,1820 v1(1650,1860)
  GND2 w15: R15.1 v1(1210,2150)
NetR16_1: R16.1 R22.2 U3.14 | length 1540.5
  SIG/PWR1 w15: v1(1300,1660) 1474.57,1660 1514.57,1620 U3.14 ; v1(1300,1750) 1300.84,1750.84 R22.2 1198.79,1940 1190,1948.79 1190,2100 1183,2107 1183,2161.18 1251.82,2230 v1(1740,2230)
  SIG/PWR2 w15: v1(1300,1660) v1(1300,1750)
  GND2 w15: R16.1 1730,2170 1730,2220 v1(1740,2230)
NetR17_2: R17.2 R20.1 U3.6 | length 1559.2
  SIG/PWR1 w15: v1(1280,1350) 1282.3,1352.3 1300.55,1352.3 1318.25,1370 U3.6
  SIG/PWR2 w15: v1(1070,1420) 1210,1420 v1(1280,1350) 1280,1268.79 1288.79,1260 1575.45,1260 1584.24,1268.79 1584.24,1834.24 v1(1680,1930)
  GND2 w15: R20.1 v1(1070,1420) ; v1(1680,1930) 1707.87,1930 1740,1962.13 R17.2
NetR18_2: R18.2 R21.1 U3.9 | length 1471.1
  SIG/PWR1 w15: R21.1 R18.2 1520,2122.13 1570,2072.13 v1(1570,2070) ; U3.9 1621.71,1370 1661.71,1410 1861.21,1410 1870,1418.79 1870,1451.21 1878.79,1460 v1(1880,1460) ; v1(1690,2070) 1761.21,2070 1770,2061.21 1770,1966.34 1773.19,1963.15 1773.19,1886.81 1830,1830 1851.21,1830 1860,1821.21 1860,1721.62 1870,1711.62 v1(1870,1600)
  SIG/PWR2 w15: v1(1570,2070) v1(1690,2070) ; v1(1870,1600) 1870,1531.62 1880,1521.62 v1(1880,1460)
NetR19_2: R19.2 R22.1 U3.13 | length 672.7
  SIG/PWR1 w15: v1(1400,1803) 1401.21,1803 1417,1818.79 1417,1894.71 1379.58,1932.13 R22.1 R19.2 ; v1(1469.38,1627) 1470,1626.38 1470,1568.79 1478.79,1560 1501.17,1560 1511.17,1570 U3.13
  SIG/PWR2 w15: v1(1400,1803) 1480,1723 1480,1669.7 1455.15,1644.85 1469.38,1630.62 v1(1469.38,1627)
NetR23_1: R23.1 R31.2 U4.1 | length 558.1
  SIG/PWR1 w15: U4.1 1388.98,840 1467.7,918.73 1467.7,937.7 v1(1470,940) 1620,940 1719.94,1039.94 1727.81,1039.94 1740,1052.13 R23.1
  GND2 w15: v1(1470,940) 1480,950 R31.2
NetR24_1: R24.1 R32.2 U4.14 | length 725.7
  SIG/PWR1 w15: U4.14 1671.21,840 1680,831.21 v1(1680,720) ; v1(1680,370) 1680,560 1683.79,563.79 1682.3,565.28 1682.3,577.7 v1(1680,580) v1(1680,650)
  SIG/PWR2 w15: v1(1680,650) v1(1680,720)
  GND2 w15: v1(1680,370) 1730,370 R32.2 ; v1(1680,580) R24.1
NetR25_2: R25.2 R31.1 U4.2 | length 538.7
  SIG/PWR1 w15: U4.2 1460,790 1483.74,813.74 1483.74,873.74 1500,890 v1(1620,890)
  GND2 w15: v1(1620,890) 1617.7,892.3 1617.7,941.67 R31.1 R25.2
NetR26_1: R26.1 R33.2 U4.7 | length 558
  SIG/PWR1 w15: v1(1220,610) 1290,540 U4.7
  SIG/PWR2 w15: v1(1210,740) 1210,618.79 1218.79,610 v1(1220,610)
  GND2 w15: R26.1 R33.2 v1(1210,740)
NetR27_1: R27.1 R34.2 U4.8 | length 765.8
  SIG/PWR1 w15: R27.1 1150,192.13 v1@1210,132.13 ; v1(1210,130) v1@1210,132.13 ; U4.8 1546.46,508.79 1537.67,500 1430,500 1210,280 v1@1210,132.13
  GND2 w15: R34.2 v1(1210,130)
NetR28_2: R28.2 R32.1 U4.13 | length 935.2
  SIG/PWR1 w15: U4.13 1641.21,790 1650,781.21 v1(1650,760)
  SIG/PWR2 w15: v1(1650,760) 1650,460 1680,430 v1(1820,430) ; v1(1790,240) 1790,280 v1(1810,300)
  GND2 w15: v1(1790,240) 1818.74,211.26 R28.2 ; v1(1810,300) 1812.3,302.3 1812.3,353.56 R32.1 1819.37,360.63 1819.37,429.37 v1(1820,430)
NetR29_2: R29.2 R33.1 U4.6 | length 564.2
  SIG/PWR1 w15: v1(1280,590) U4.6
  SIG/PWR2 w15: v1(1060,510) 1062.3,507.7 1074.72,507.7 1076.21,506.21 1090,520 1210,520 v1(1280,590)
  GND2 w15: v1(1060,510) 1062.3,512.3 1062.3,561.67 R29.2 R33.1
NetR30_2: R30.2 R34.1 U4.9 | length 836.5
  SIG/PWR1 w15: v1(1220,360) 1222.3,362.3 1249.85,362.3 1437.51,549.95 1437.51,552.77 1474.74,590 U4.9
  SIG/PWR2 w15: v1(1010,140) 1010,180 v1(1140,310)
  GND2 w15: v1(1010,140) 1020,130 R34.1 ; v1(1140,310) 1142.3,312.3 1142.3,345.05 1149.37,352.13 R30.2 v1(1220,360)
PE_GND: C1.2 C2.2 C3.2 C4.2 C5.2 C6.2 C7.2 C8.2 J1.6 J1.8 | length 7884.8
  SIG/PWR1 w15: C6.2 C7.2 1726.75,1230 1746.75,1210 v1(1750,1210) 1788.45,1248.45 2273.29,1248.45 2280.87,1240.87 2360.87,1240.87 2390,1270 ; C5.2 1149.37,2169.37 v1(1350,2370) 1350,2278.79 1358.79,2270 v1(1690,2270) 1815,2270 1835,2250 v1(1960,2250) ; J1.8 J1.6 ; v1(1650,130) 1687.87,130 1750,192.13 C1.2 v1(1680,200) ; v1(1680,90) 1680,28.79 1688.79,20 2381.21,20 2390,28.79 2390,1270 ; v1(1680,2130) C3.2 ; v1(2010,2160) v1(2130,2160) ; v1(2280,2160) 2380,2160 2390,2150 2390,1270
  SIG/PWR2 w15: v1(1350,2370) 1350,2770.66 1620,3040.66 J1.8 ; v1(1680,90) v1(1680,200) ; v1(1680,2130) 1680,2160 1690,2170 v1(1690,2270) ; v1(1960,2250) 1960,2210 v1(2010,2160) ; v1(2130,2160) v1(2280,2160)
  GND2 w15: v1(1350,2370) C4.2 ; C8.2 v1(1650,130) ; C2.2 1740,1200 v1(1750,1210)
REF_3V: C10.1 C11.2 J1.13 J1.15 R12.1 R17.1 R18.1 R19.1 R25.1 R28.1 R29.1 R30.1 U2.4 | length 8396.9
  SIG/PWR1 w15: J1.15 1176.97,3593.03 1002.18,3593.03 649.37,3240.22 649.37,2844.8 680.24,2813.94 C10.1 680.24,2806.06 704.23,2782.07 712.11,2782.07 763.78,2730.39 U2.4 ; v1(1580,1880) 1590,1890 1590,1930.84 R19.1 1598.95,1940.21 1598.95,2129.79 R18.1 ; v1(1890,1750) 1890,1746.75 1900,1736.75 v1(1900,1580) ; v1(1910,780) v1(1910,1030)
  SIG/PWR2 w15: J1.15 J1.13 1372.28,3497.72 1833.13,3497.72 1876.97,3453.88 1876.97,2961.21 1920,2918.18 1920,1970 ; v1(1230,500) 1265.91,464.09 1265.91,85.91 1301.82,50 v1(1750,50) 1920,220 1920,771.21 1911.21,780 v1(1910,780) ; v1(1580,1880) 1710,2010 1871.21,2010 1880,2001.21 v1(1880,1970) 1920,1970 ; v1(1890,1750) 1890,1870 1920,1900 1920,1970 ; v1(1900,1580) 1901.21,1580 1910,1571.21 v1(1910,1030)
  GND2 w15: R30.1 1070.63,367.87 1149.37,446.61 R29.1@1149.37,562.13 ; R29.1 R29.1@1149.37,562.13 ; v1(1230,500) 1192.85,537.15 1174.35,537.15 R29.1@1149.37,562.13 ; R28.1 1740,60 v1(1750,50) ; R12.1 1828.74,1750 v1(1890,1750) ; R17.1 v1(1880,1970) ; R25.1 1819.37,957.87 1889.2,1027.7 1907.7,1027.7 v1(1910,1030)
S\P\I\_\A\_\S\T\E\_\H\S\: J1.10
S\P\I\_\C\_\S\T\E\: C14.1 J1.2 U1.6 | length 862.8
  SIG/PWR1 w15: U1.6 1535,3034.02 1639.02,2930 C14.1 1720.63,2937.87 1920,3137.24 J1.2
S\P\I\S\T\E\A\_5V: U1.7 U2.16 | length 331.9
  SIG/PWR1 w15: U2.16 1570,2866.75 1590,2886.75 v1(1590,2890) ; U1.7 1585,3034.02 1629.02,2990 v1(1650,2990)
  SIG/PWR2 w15: v1(1590,2890) 1590,2930 v1(1650,2990)
SPI_A_CK_HS: J1.11
SPI_A_MI_HS: J1.12
SPI_A_MO_HS: J1.9
SPI_C_CK: C12.1 J1.3 U1.2 | length 1053.6
  SIG/PWR1 w15: C12.1 1199.37,2937.87 1211.55,2950.06 1251.04,2950.06 1332.18,3031.2 1332.18,3065.51 1332.18,3094.19 U1.2@1333.35,3095.36 ; U1.2 1335,3093.71 U1.2@1333.35,3095.36 ; J1.3 1763.03,3493.03 1763.03,3315.22 1645.48,3197.68 1435.67,3197.68 U1.2@1333.35,3095.36
SPI_C_MI: J1.4
SPI_C_MO: C13.1 J1.1 U1.4 | length 909.1
  SIG/PWR1 w15: C13.1 1446.71,2933.92 1446.71,2980.06 1435,2991.77 U1.4 1437.82,3068.33 1437.82,3099.82 1514.67,3176.68 1654.18,3176.68 1863.03,3385.53 1863.03,3493.03 J1.1
SPICLKA_5V: U1.3 U2.1 | length 289
  SIG/PWR1 w15: U2.1 1351.85,2805.98 1385,2839.13 U1.3
SPISIMOA_5V: U1.5 U2.2 | length 408.3
  SIG/PWR1 w15: U2.2 1391.95,2780.79 1392.74,2780 1440,2780 1485,2825 U1.5
VOUTA: U2.5 U4.12 | length 3189.9
  SIG/PWR1 w15: v1(800,1280) 800,2696.41 808.79,2705.2 U2.5 ; v1(1260,1130) 1360,1130 1360,980 v1(1420,920) ; v1(1450,740) U4.12
  SIG/PWR2 w15: v1(800,1280) 801.21,1278.79 801.21,1138.79 810,1130 v1(1260,1130) ; v1(1420,920) 1430,920 1450,900 v1(1450,740)
VOUTB: U2.6 U4.3 | length 2692.1
  SIG/PWR1 w15: v1(890,1290) 890,1293.25 909,1312.25 909,2598.7 990.3,2680 U2.6 ; v1(1220,1190) 1220,808.79 1288.79,740 U4.3
  SIG/PWR2 w15: v1(890,1290) 990,1190 v1(1220,1190)
VOUTC: U2.7 U3.5 | length 2201.1
  SIG/PWR1 w15: v1(940,1320) 940,1323.25 930,1333.25 930,2590 994.8,2654.8 U2.7 ; v1(1280,1410) 1283.25,1410 1290.84,1417.6 1354.68,1417.6 U3.5
  SIG/PWR2 w15: v1(940,1320) 1000.56,1380.56 1000.56,1388.74 1058.82,1447 1233,1447 1270,1410 v1(1280,1410)
VOUTD: U2.8 U3.12 | length 1939.8
  SIG/PWR1 w15: v1(1000,1630) 983,1647 983,2235.91 990,2242.91 990,2610 1009.61,2629.61 U2.8 ; v1(1470,1520) U3.12
  SIG/PWR2 w15: v1(1000,1630) 1050,1630 1120,1560 1430,1560 v1(1470,1520)
VOUTE: U2.9 U3.10 | length 2983.5
  SIG/PWR1 w15: U3.10 1470,1420 1460,1410 1460,1288.79 1468.79,1280 1670,1280 1740,1350 v1(2120,1350) ; U2.9 1570,2490 1561.21,2481.21 1527.91,2481.21 1522.12,2487 1477,2487 1450,2460 1450,2428.79 1458.79,2420 1650,2420 1660,2430 2070,2430 2160,2340 2160,1900 v1(2140,1880)
  SIG/PWR2 w15: v1(2120,1350) 2123.25,1350 2133.25,1360 2140,1360 v1(2140,1880)
VOUTF: U2.10 U3.3 | length 2210.9
  SIG/PWR1 w15: v1(960,1540) v1(960,1630) ; v1(1280,1520) U3.3 ; v1(1340,1750) 1350,1760 1350,1820 v1(1390,1860) ; v1(1460,2310) 1586.75,2310 1596.75,2320 v1(1600,2320) ; U2.10 1617.01,2654.8 1621.82,2650 1661.21,2650 1670,2641.21 v1(1670,2500)
  SIG/PWR2 w15: v1(960,1540) 961,1539 1261,1539 v1(1280,1520) ; v1(960,1630) 960,1680 1057,1777 1313,1777 v1(1340,1750) ; v1(1390,1860) 1400,1860 1460,1920 v1(1460,2310) ; v1(1600,2320) 1631.82,2320 1670,2358.18 v1(1670,2500)
VOUTG: U2.11 U4.5 | length 2606.1
  SIG/PWR1 w15: v1(1230,1820) 1231,1819 1231,1617.18 1239,1609.18 1239,1570.09 1248.69,1560.39 v1(1248.69,1339.56) ; v1(1270,650) 1280,650 1290,640 U4.5 ; U2.11 v1(1630,2680)
  SIG/PWR2 w15: v1(1230,1820) 1233.25,1820 1243.25,1830 1531.21,1830 1540,1838.79 1540,2581.21 1548.79,2590 1621.21,2590 1630,2598.79 v1(1630,2680) ; v1(1248.69,1339.56) 1248.69,1336.32 1259,1326.01 1259,1255.77 1310,1204.77 1310,839.77 1270,799.77 v1(1270,650)
VOUTH: U2.12 U4.10 | length 2979.8
  SIG/PWR1 w15: U4.10 1601.21,640 1610,648.79 v1(1610,650) ; U2.12 1570.41,2705.61 1616.12,2705.61 1617.51,2707 1687.29,2707 1754.29,2640 1940,2640 v1(1970,2670)
  SIG/PWR2 w15: v1(1610,650) 1610,758.18 1721.82,870 1730,870 1740,880 1941.21,880 1950,888.79 1950,1400 2100,1550 2100,2661.21 2091.21,2670 v1(1970,2670)
pads on no net: U1.9 U1.10 U1.11 U1.12 U1.13 U1.14

## Polygon pours and split planes (outlines as drawn)
AGND on GND1 "AGND_L02_P000" (solid, pour order 0): 0,3720 2900,3720 2900,30 2870,0 0,0
AGND on GND2 "AGND_L04_P001" (solid, pour order 1): 20,3720 2910,3720 2910,10 2900,0 20,0

## Keep-outs
Keep-Out Layer:
  lines w10: 0,0 0,3720 2910,3720 2910,0 0,0